# Altium PCB Primavera.PcbDoc
Units mm, origin at the board's own origin, x right, y up, seen from the top; angles counter-clockwise.
Board outline 55 x 107 mm, 4 copper layers (Top Layer, Layer 1, Layer 2, Bottom Layer), stack 0.603 mm thick; 15 components, 27 nets, 114 pads, 0 vias.
Unrouted connection lines stored in the file: 30.
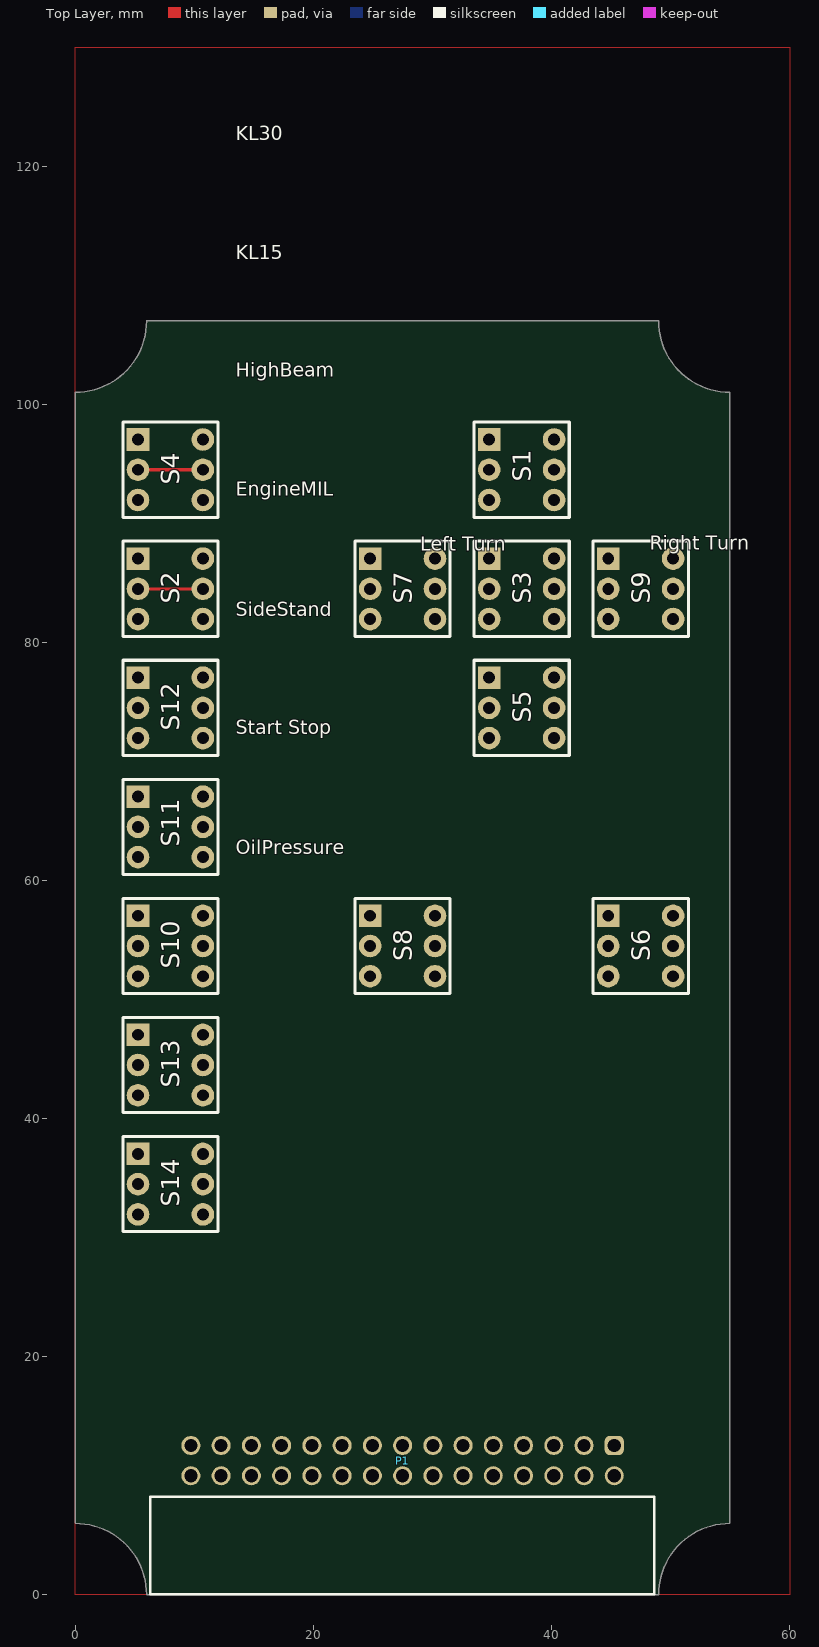
[diagram p0: Top Layer view]
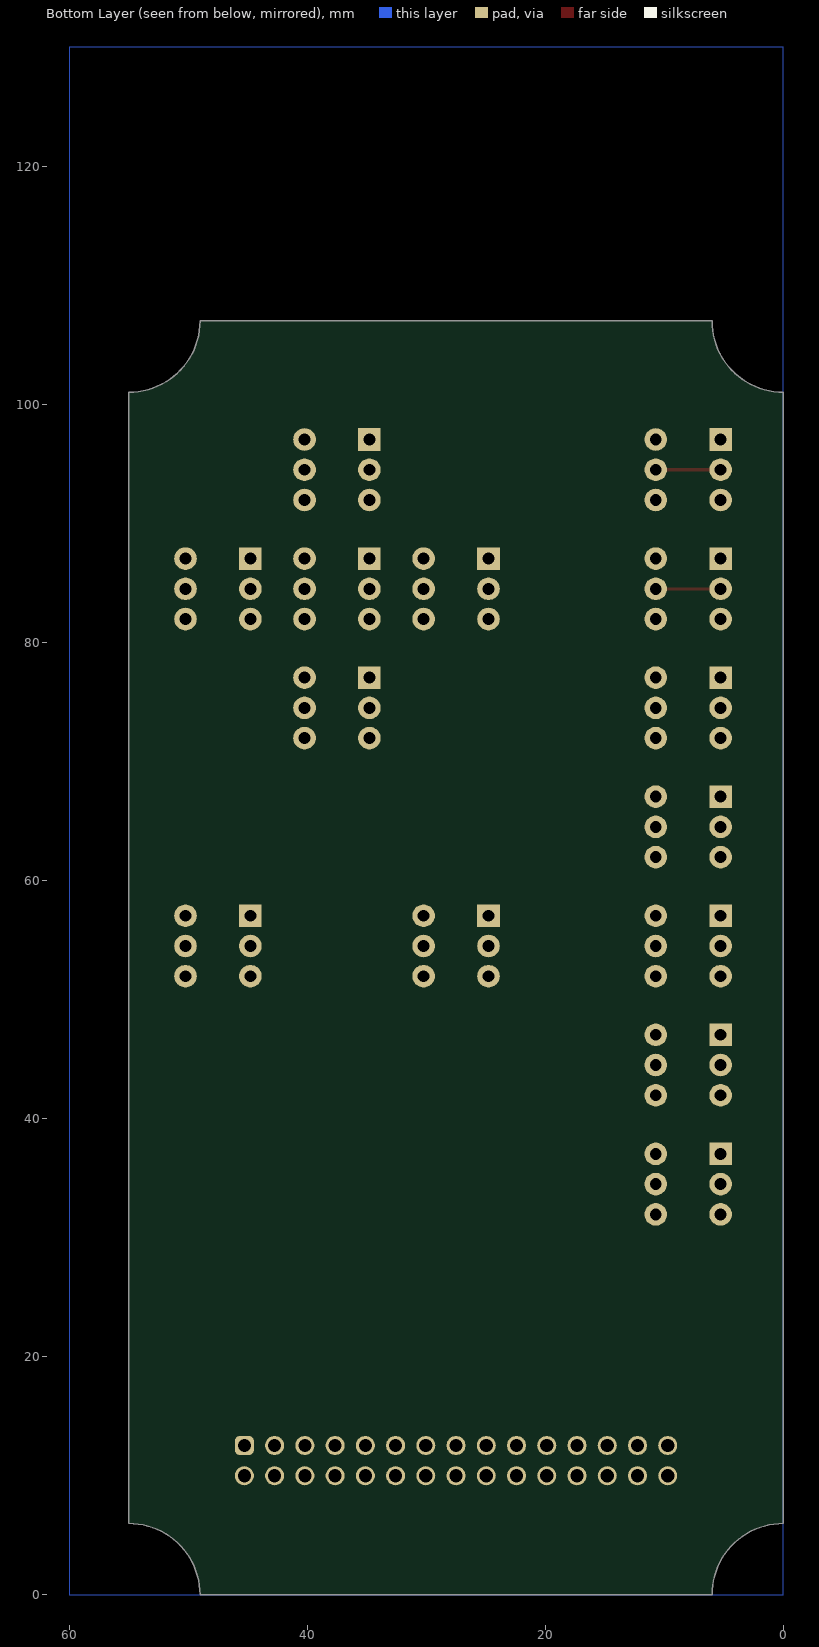
[diagram p1: Bottom Layer view, seen from below]
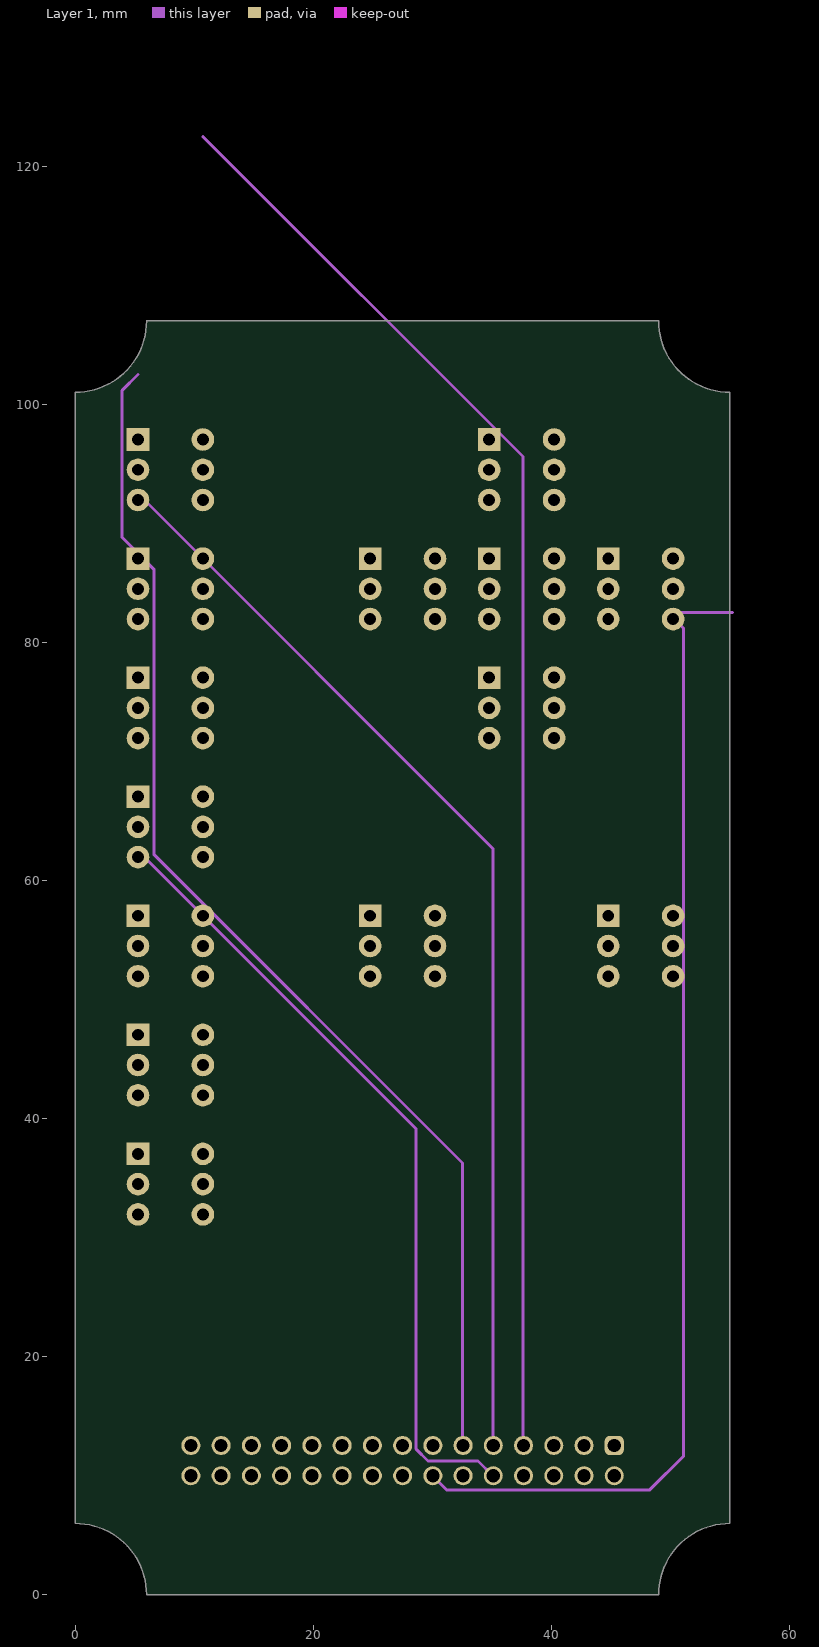
[diagram p2: Layer 1]
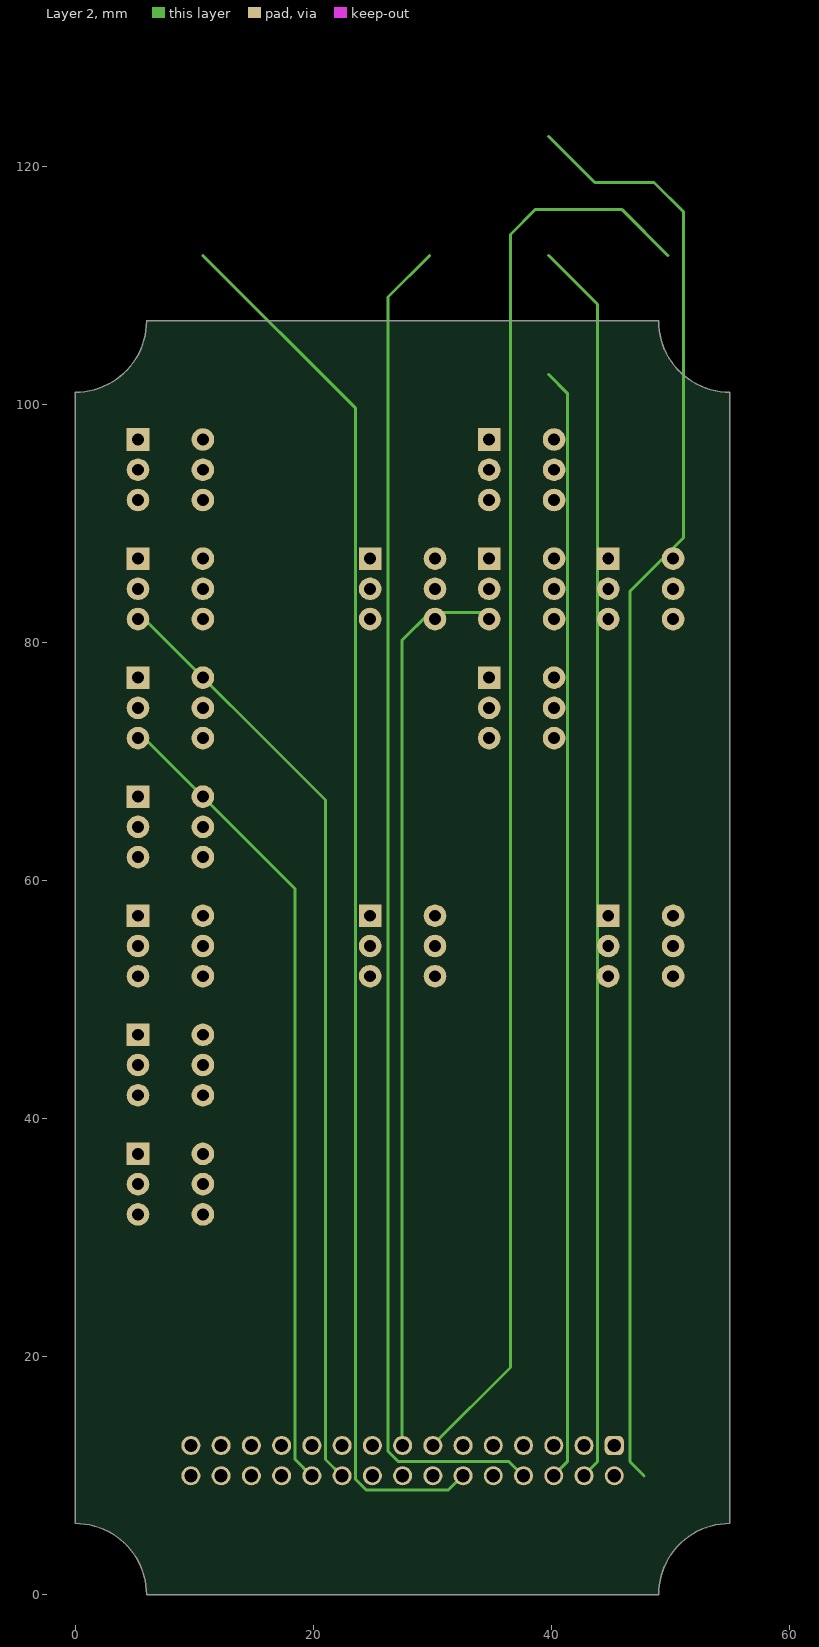
[diagram p3: Layer 2]
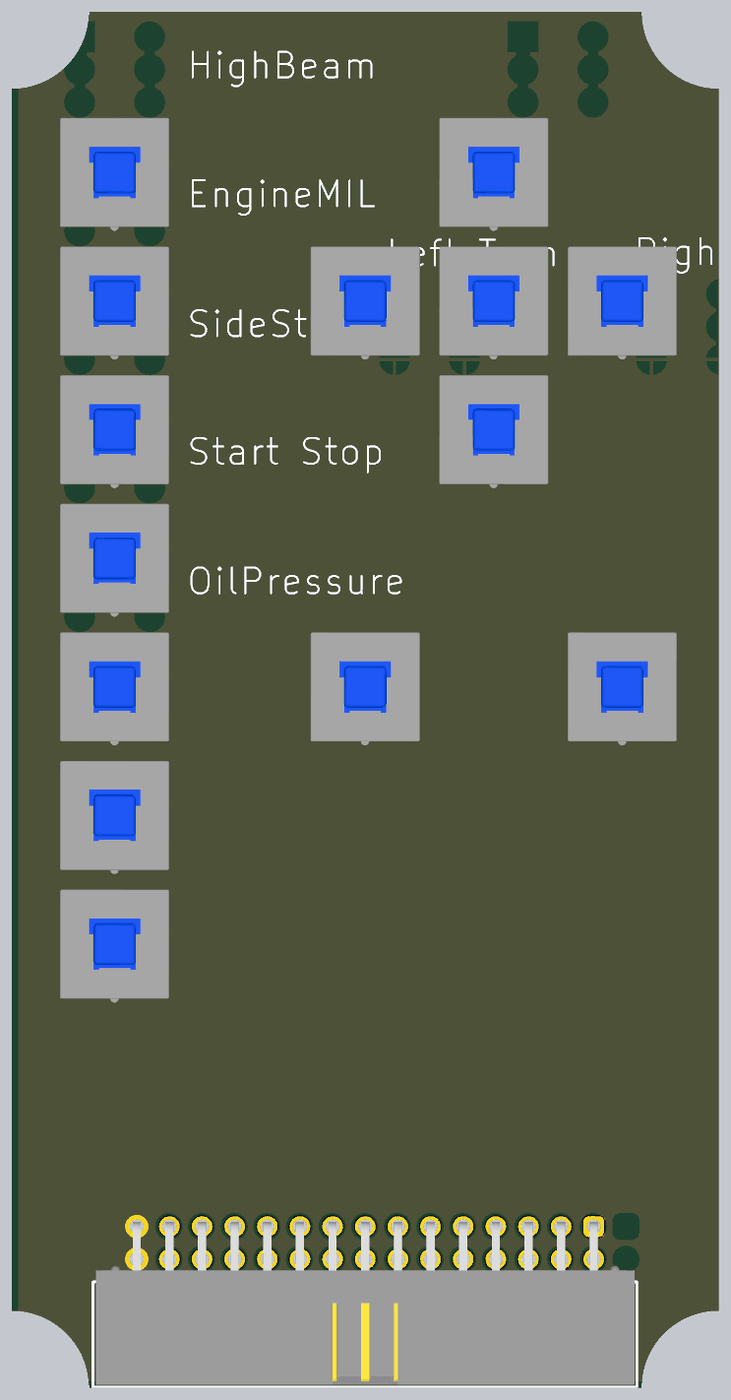
[diagram p4: 3D render of the assembled board from above, using the file's embedded part models]

## Layer stack, top to bottom
Top Solder: solder mask 0.0102, Solder Resist, Dk 3.5
Top Layer: signal copper 0.0356
Dielectric 2: prepreg 0.0711, PP-006, Dk 4.1
Layer 1: signal copper 0.035
Dielectric 1: dielectric 0.32, FR-4, Dk 4.8
Layer 2: signal copper 0.035
Dielectric 3: prepreg 0.0711, PP-006, Dk 4.1
Bottom Layer: signal copper 0.0356
Bottom Solder: solder mask 0.0102, Solder Resist, Dk 3.5

## Board outline
0,6 0,101 ccw(c0,107) 6,107 49,107 ccw(c55,107) 55,101 55,6 ccw(c55,0) 49,0 6,0 ccw(c0,0)

## Design rules (kind name [scope] priority, off if disabled: settings)
BoardOutlineClearance [All] p1: gap=0.5 ignorepadtopadclearanceinfootprint=FALSE
Clearance [All] p1: gap=0.254 ignorepadtopadclearanceinfootprint=FALSE
MinimumSolderMaskSliver [All] p1: minsoldermaskwidth=0.1
PolygonConnect [All] p1: connectstyle=Relief reliefconductorwidth=0.254 reliefentries=4 polygonreliefangle="90 Angle" airgapwidth=0.254
RoutingVias [All] p1: holewidth=0.711 width=1.27 viastyle="Through Hole" minholewidth=0.711 minwidth=1.27 maxholewidth=0.711 maxwidth=1.27
SilkToSolderMaskClearance [IsPad] p1: minsilkscreentomaskgap=0.1 clearancetoexposedcopper=TRUE
SolderMaskExpansion [All] p1: expansion=0.102 istentingtop=FALSE
SupplyNets "Schematic Supply Nets" [InNet('GND')] p1: voltage=0.000
SupplyNets "Schematic Supply Nets_1" [InNet('+12V')] p2: voltage=0.000
Width [All] p1: maxlimit=0.254 minlimit=0.254 preferedwidth=0.254
28 further rules are at their usual default settings.

## Components (designator, comment, footprint, x,y, rotation, side; value= is the part's Value field where it differs from the comment)
P1 "_30" "61203421721 - 30pole" 27.5,3.735 r0 top
S1 "UP" 8.5x8.5_DPDT 37.5,94.5 r0 top
S2 "KL15" 8.5x8.5_DPDT 8,84.5 r0 top
S3 "CENTRAL" 8.5x8.5_DPDT 37.5,84.5 r0 top
S4 "KL30" 8.5x8.5_DPDT 8,94.5 r0 top
S5 "DOWN" 8.5x8.5_DPDT 37.5,74.5 r0 top
S6 "Right Turn" 8.5x8.5_DPDT 47.5,54.5 r0 top
S7 "LEFT" 8.5x8.5_DPDT 27.5,84.5 r0 top
S8 "Left Turn" 8.5x8.5_DPDT 27.5,54.5 r0 top
S9 "RIGHT" 8.5x8.5_DPDT 47.5,84.5 r0 top
S10 "SideStand" 8.5x8.5_DPDT 8,54.5 r0 top
S11 "SideStand" 8.5x8.5_DPDT 8,64.5 r0 top
S12 "SideStand" 8.5x8.5_DPDT 8,74.5 r0 top
S13 "SideStand" 8.5x8.5_DPDT 8,44.5 r0 top
S14 "SideStand" 8.5x8.5_DPDT 8,34.5 r0 top

## Footprints (in the part's own frame and the unit in brackets; to place one, negate y for a bottom-side part, rotate by r counter-clockwise, add the part's x,y. Pads: shape width x height; smd on the part's side, far side on the other; paste and mask are expansions set on the pad)
8.5x8.5_DPDT [mm]
  rect 1.9x1.9 hole 1: 1(-2.725,2.54)
  round 1.9 hole 1: 2(-2.725,0) 3(-2.725,-2.54) 4(2.725,2.54) 5(2.725,0) 6(2.725,-2.54)
  silkscreen extent -4,-4 4,4, body extent -4.25,-4.55 4.25,4.25, height 14.1
"61203421721 - 30pole" [mm] "30pins, right angled, gold plating"
  rrect50% 1.6x1.6 hole 1.1: 1(17.78,8.805)
  round 1.6 hole 1.1: 2(17.78,6.265) 3(15.24,8.805) 4(15.24,6.265) 5(12.7,8.805) 6(12.7,6.265) 7(10.16,8.805) 8(10.16,6.265) 9(7.62,8.805) 10(7.62,6.265) 11(5.08,8.805) 12(5.08,6.265) 13(2.54,8.805) 14(2.54,6.265) 15(0,8.805) 16(0,6.265) 17(-2.54,8.805) 18(-2.54,6.265) 19(-5.08,8.805) 20(-5.08,6.265) 21(-7.62,8.805) 22(-7.62,6.265) 23(-10.16,8.805) 24(-10.16,6.265) 25(-12.7,8.805) 26(-12.7,6.265) 27(-15.24,8.805) 28(-15.24,6.265) 29(-17.78,8.805) 30(-17.78,6.265)
  silkscreen extent -21.18,-3.68 21.13,4.5, body extent -20.96,-3.49 20.95,9.14, height 9.45

## Part data
P1: library part 61202622121_30, "WR-BHD Box Header with short lever, Male, pitch 2.54mm, THT, Right Angle, 30p", Contact Resistance=20mOhm, Insulation Resistance=1000MOhm, Manufacturer="Wurth Elektronik", Manufacturer Part Number=61202622121, Operating Temperature max.=105C, Operating Temperature min.=-40C, Rated Current=3A, Withstanding Voltage=500V, Working Voltage=250V, ComponentLink1Description="Manufacturer Link", ComponentLink1URL=http://www.we-online.de, ComponentLink2Description=Datasheet, ComponentLink2URL=https://www.we-online.com/catalog/datasheet/61202622121.pdf, Gender=Male, Height=8.3mm, Length=52.32mm, Mounting Technology=THT, Number of Positions=26, Number of Rows=2, Orientation="Right Angle", Packaging=Tray, Pitch=2.54mm, Width=24.5mm
S1 S2 S3 S4 S5 S6 S7 S8 S9 S10 S11 S12 S13 S14: library part 8.5x8.5_DPDT

## Nets (pads, with @x,y where several pads share a name; then routed paths per layer and width w, separated by ;. In a path a pad name is that pad's centre, name@x,y a point inside that pad or via, vN(x,y) a via of type N, cw(c..) or ccw(c..) an arc to the next point about the centre after c; other vN are vias at no path point)
18: P1.18
20: P1.20
+12V: S2.3 S2.6 S4.3 S4.6 S6.3 S6.6 S8.3 S8.6
AirTempInput: P1.23
CANH: P1.26
CANL: P1.25
EngineMilIcon: P1.11 S11.2 | length 92.3
  Layer 1 w0.254: 5.275,92.5 35.08,62.695 35.08,12.54
FuelSensorInput: P1.4
GND: P1.21 P1.27 P1.28 P1.29 P1.30 S1.1 S1.4 S2.1 S2.4 S3.1 S3.4 S4.1 S4.4 S5.1 S5.4 S6.1 S6.4 S7.1 S7.4 S8.1 S8.4 S9.1 S9.4 S10.1 S10.4 S11.1 S11.4 S12.1 S12.4 S13.1 S13.4 S14.1 S14.4
HighBeamTellTale: P1.13 S12.2 | length 102.4
  Layer 1 w0.254: 5.275,102.5 3.944,101.169 3.944,88.81 6.606,86.148 6.606,62.197 32.54,36.263 32.54,12.54
Immobilizer: P1.19
JoyStickCentral: P1.6 S3.2 | length 104.7
  Layer 2 w0.254: 39.775,112.5 43.881,108.394 43.881,11.181 42.7,10
JoyStickDown: P1.8 S5.2 | length 93.6
  Layer 2 w0.254: 39.775,102.5 41.341,100.934 41.341,11.181 40.16,10
JoyStickLeft: P1.10 S7.2 | length 114.1
  Layer 2 w0.254: 29.775,112.5 26.279,109.004 26.279,12.051 27.149,11.181 36.439,11.181 37.62,10
JoystickRight: P1.15 S9.2 | length 120.1
  Layer 2 w0.254: 30,12.54 36.556,19.096 36.556,114.26 38.667,116.371 45.904,116.371 49.775,112.5
JoyStickUp: P1.2 S1.2 | length 122.5
  Layer 2 w0.254: 39.775,122.5 43.646,118.629 48.625,118.629 51.106,116.148 51.106,88.81 46.599,84.303 46.599,11.181 47.78,10
KL15: P1.14 S2.2 S2.5 | length 123.4
  Top Layer w0.254: S2.2 S2.5
  Layer 2 w0.254: 10.725,112.5 23.561,99.664 23.561,9.689 24.431,8.819 31.359,8.819 32.54,10
KL30: P1.9 S4.2 S4.5 | length 126.6
  Top Layer w0.254: S4.2 S4.5
  Layer 1 w0.254: 10.725,122.5 37.62,95.605 37.62,12.54
LeftFrontOut: P1.5
LeftRearOut: P1.1
LeftTurnIn: P1.17 S8.2 S8.5 | length 76.4
  Layer 2 w0.254: 27.46,12.54 27.46,80.185 29.775,82.5 35.225,82.5
OilPressureTellTale: P1.12 S14.2 | length 67.3
  Layer 1 w0.254: 5.275,62.5 28.641,39.134 28.641,12.229 29.627,11.243 33.837,11.243 35.08,10
RightFrontOut: P1.7
RightRearOut: P1.3
RightTurnIn: P1.16 S6.2 S6.5 | length 99.6
  Layer 1 w0.254: 30,10 31.181,8.819 48.269,8.819 51.106,11.656 51.106,81.169 49.775,82.5 55.225,82.5
SideStandIcon: P1.22 S10.2 | length 79.6
  Layer 2 w0.254: 5.275,82.5 21.021,66.754 21.021,11.359 22.38,10
StartStopTellTale: P1.24 S13.2 | length 68.5
  Layer 2 w0.254: 5.275,72.5 18.481,59.294 18.481,11.359 19.84,10
pads on no net: S1.3 S1.5 S1.6 S3.3 S3.5 S3.6 S5.3 S5.5 S5.6 S7.3 S7.5 S7.6 S9.3 S9.5 S9.6 S10.3 S10.5 S10.6 S11.3 S11.5 S11.6 S12.3 S12.5 S12.6 S13.3 S13.5 S13.6 S14.3 S14.5 S14.6

## Polygon pours and split planes (outlines as drawn)
GND on Bottom Layer "BOT" (solid, shelved, pour order 0): 0,0 0,130 60,130 60,0
+12V on Top Layer "BOT" (solid, shelved, pour order 1): 0,0 0,130 60,130 60,0

## Silkscreen, mask and mechanical layers (free items; w line width, h text height)
Top Overlay:
  text "KL30" at 13.5,121.772 h2
  text "KL15" at 13.5,111.771 h2
  text "HighBeam" at 13.5,101.876 h2
  text "EngineMIL" at 13.5,91.876 h2
  text "Right Turn" at 48.25,87.376 h2
  text "Left Turn" at 29,87.271 h2
  text "SideStand" at 13.5,81.771 h2
  text "Start Stop" at 13.5,71.855 h2
  text "OilPressure" at 13.5,61.771 h2
Mechanical 1:
  lines w0.1: 27.5,-6 27.5,20 ; 0,6 cw(c0,0) 6,0 49,0 cw(c55,0) 55,6 55,101 cw(c55,107) 49,107 6,107 cw(c0,107) 0,101 0,6

## Dimensions
0,101 to 55,101 on Mechanical 2
6,0 to 6,107 on Mechanical 2